# EAGLE board nintendo (EAGLE 7.7.0)
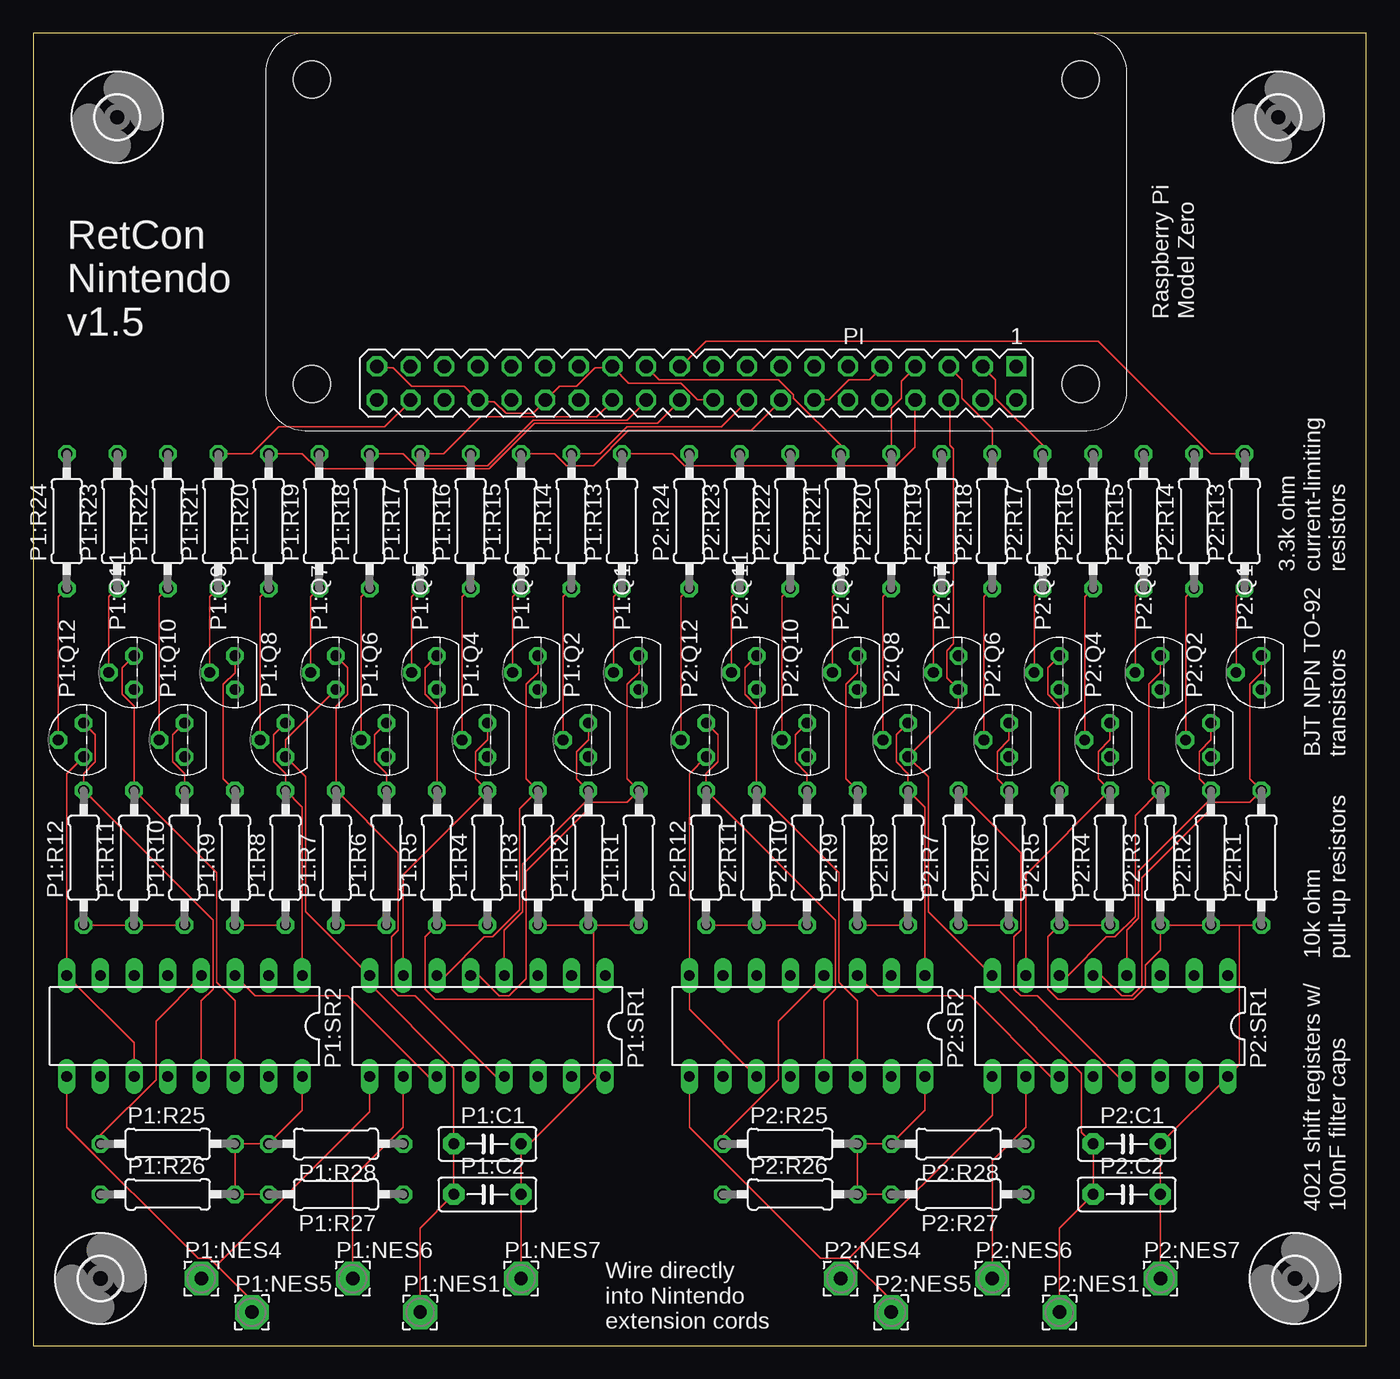
[diagram p0: board, top side]
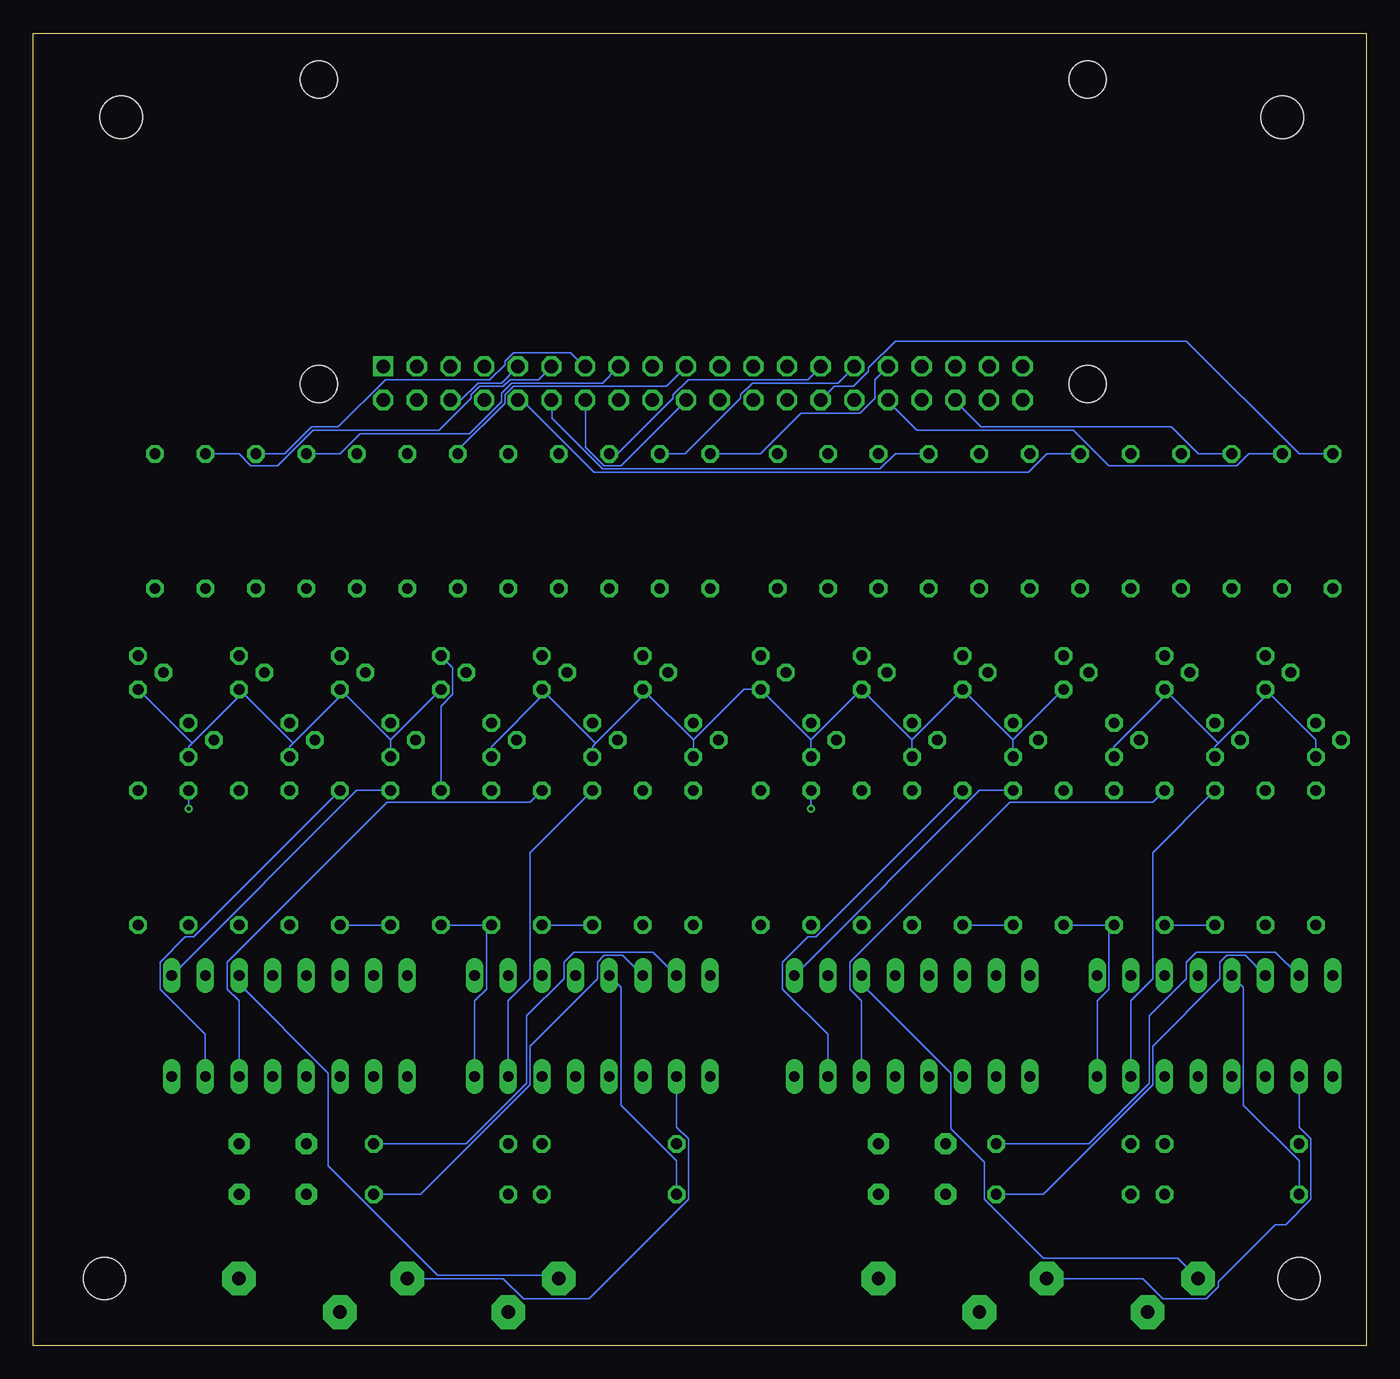
[diagram p1: board, bottom side, seen from below]

Size 100.64 x 99.05 mm. Coordinates in mm from the lower left corner, seen from the top.
Outline: 0,0 100.64,0 100.64,99.05 0,99.05 0,0
Copper layers (1*16): Top 0.035mm / dielectric 1.5mm / Bottom 0.035mm
Design rules "dirt_cheap_dirty_boards.v1": minimum track width 5mil, minimum drill 12mil, track to track 5mil, track to pad 5mil, pad to pad 5mil, via to via 5mil, smd to smd 0mil, copper to edge 10mil, drill to drill 10mil, minimum pad ring 10mil, minimum via ring 6mil, stop-mask expansion 2mil, vias tented up to drill 25mil, thermal gap 10mil

## Footprints (pad centres in the part's own frame; a part is rotated, then mirrored left to right if it is on the bottom)
C5B2.5 = drill 0.813 pad 1.6 octagon: 1 -2.54,0; 2 2.54,0
2,54/1,0 = drill 1.016 pad 2.54 octagon: 1 0,0
TO92 = drill 0.813 octagon: 1 1.27,0; 2 0,1.905; 3 -1.27,0
0207/10 = drill 0.813 octagon: 1 -5.08,0; 2 5.08,0
DIL16 = drill 0.813 long: 1 -8.89,-3.81; 2 -6.35,-3.81; 3 -3.81,-3.81; 4 -1.27,-3.81; 5 1.27,-3.81; 6 3.81,-3.81; 7 6.35,-3.81; 8 8.89,-3.81; 9 8.89,3.81; 10 6.35,3.81; 11 3.81,3.81; 12 1.27,3.81; 13 -1.27,3.81; 14 -3.81,3.81; 15 -6.35,3.81; 16 -8.89,3.81
PIZERO_THOUGH_HOLE = drill 1.016 square: 1 8.34,25.15 | drill 1.016 octagon: 2 8.34,27.69; 3 10.88,25.15; 4 10.88,27.69; 5 13.42,25.15; 6 13.42,27.69; 7 15.96,25.15; 8 15.96,27.69; 9 18.5,25.15; 10 18.5,27.69; 11 21.04,25.15; 12 21.04,27.69; 13 23.58,25.15; 14 23.58,27.69; 15 26.12,25.15; 16 26.12,27.69; 17 28.66,25.15; 18 28.66,27.69; 19 31.2,25.15; 20 31.2,27.69; 21 33.74,25.15; 22 33.74,27.69; 23 36.28,25.15; 24 36.28,27.69; 25 38.82,25.15; 26 38.82,27.69; 27 41.36,25.15; 28 41.36,27.69; 29 43.9,25.15; 30 43.9,27.69; 31 46.44,25.15; 32 46.44,27.69; 33 48.98,25.15; 34 48.98,27.69; 35 51.52,25.15; 36 51.52,27.69; 37 54.06,25.15; 38 54.06,27.69; 39 56.6,25.15; 40 56.6,27.69 | hole 2.8: 3.5,3.5; 3.5,26.5; 61.5,26.5; 61.5,3.5
3,2 = hole 3.2: 0,0

## Placement (x,y rotation side)
P1:C1  100nF  [C5B2.5]  34.29,15.24 0 top
P1:C2  100nF  [C5B2.5]  34.29,11.43 0 top
P1:NES1  -  [2,54/1,0]  29.21,2.54 0 top
P1:NES4  -  [2,54/1,0]  12.7,5.08 0 top
P1:NES5  -  [2,54/1,0]  16.51,2.54 0 top
P1:NES6  -  [2,54/1,0]  24.13,5.08 0 top
P1:NES7  -  [2,54/1,0]  36.83,5.08 0 top
P1:Q1  2N3904  [TO92]  45.72,50.8 90 top
P1:Q2  2N3904  [TO92]  41.91,45.72 90 top
P1:Q3  2N3904  [TO92]  38.1,50.8 90 top
P1:Q4  2N3904  [TO92]  34.29,45.72 90 top
P1:Q5  2N3904  [TO92]  30.48,50.8 90 top
P1:Q6  2N3904  [TO92]  26.67,45.72 90 top
P1:Q7  2N3904  [TO92]  22.86,50.8 90 top
P1:Q8  2N3904  [TO92]  19.05,45.72 90 top
P1:Q9  2N3904  [TO92]  15.24,50.8 90 top
P1:Q10  2N3904  [TO92]  11.43,45.72 90 top
P1:Q11  2N3904  [TO92]  7.62,50.8 90 top
P1:Q12  2N3904  [TO92]  3.81,45.72 90 top
P1:R1  10k  [0207/10]  45.72,36.83 90 top
P1:R2  10k  [0207/10]  41.91,36.83 90 top
P1:R3  10k  [0207/10]  38.1,36.83 90 top
P1:R4  10k  [0207/10]  34.29,36.83 90 top
P1:R5  10k  [0207/10]  30.48,36.83 90 top
P1:R6  10k  [0207/10]  26.67,36.83 90 top
P1:R7  10k  [0207/10]  22.86,36.83 90 top
P1:R8  10k  [0207/10]  19.05,36.83 90 top
P1:R9  10k  [0207/10]  15.24,36.83 90 top
P1:R10  10k  [0207/10]  11.43,36.83 90 top
P1:R11  10k  [0207/10]  7.62,36.83 90 top
P1:R12  10k  [0207/10]  3.81,36.83 90 top
P1:R13  3.3k  [0207/10]  44.45,62.23 90 top
P1:R14  3.3k  [0207/10]  40.64,62.23 90 top
P1:R15  3.3k  [0207/10]  36.83,62.23 90 top
P1:R16  3.3k  [0207/10]  33.02,62.23 90 top
P1:R17  3.3k  [0207/10]  29.21,62.23 90 top
P1:R18  3.3k  [0207/10]  25.4,62.23 90 top
P1:R19  3.3k  [0207/10]  21.59,62.23 90 top
P1:R20  3.3k  [0207/10]  17.78,62.23 90 top
P1:R21  3.3k  [0207/10]  13.97,62.23 90 top
P1:R22  3.3k  [0207/10]  10.16,62.23 90 top
P1:R23  3.3k  [0207/10]  6.35,62.23 90 top
P1:R24  3.3k  [0207/10]  2.54,62.23 90 top
P1:R25  10k  [0207/10]  10.16,15.24 0 top
P1:R26  10k  [0207/10]  10.16,11.43 0 top
P1:R27  10k  [0207/10]  22.86,11.43 180 top
P1:R28  10k  [0207/10]  22.86,15.24 180 top
P1:SR1  4021N  [DIL16]  34.29,24.13 180 top
P1:SR2  4021N  [DIL16]  11.43,24.13 180 top
P2:C1  100nF  [C5B2.5]  82.55,15.24 0 top
P2:C2  100nF  [C5B2.5]  82.55,11.43 0 top
P2:NES1  -  [2,54/1,0]  77.47,2.54 0 top
P2:NES4  -  [2,54/1,0]  60.96,5.08 0 top
P2:NES5  -  [2,54/1,0]  64.77,2.54 0 top
P2:NES6  -  [2,54/1,0]  72.39,5.08 0 top
P2:NES7  -  [2,54/1,0]  85.09,5.08 0 top
P2:Q1  2N3904  [TO92]  92.71,50.8 90 top
P2:Q2  2N3904  [TO92]  88.9,45.72 90 top
P2:Q3  2N3904  [TO92]  85.09,50.8 90 top
P2:Q4  2N3904  [TO92]  81.28,45.72 90 top
P2:Q5  2N3904  [TO92]  77.47,50.8 90 top
P2:Q6  2N3904  [TO92]  73.66,45.72 90 top
P2:Q7  2N3904  [TO92]  69.85,50.8 90 top
P2:Q8  2N3904  [TO92]  66.04,45.72 90 top
P2:Q9  2N3904  [TO92]  62.23,50.8 90 top
P2:Q10  2N3904  [TO92]  58.42,45.72 90 top
P2:Q11  2N3904  [TO92]  54.61,50.8 90 top
P2:Q12  2N3904  [TO92]  50.8,45.72 90 top
P2:R1  10k  [0207/10]  92.71,36.83 90 top
P2:R2  10k  [0207/10]  88.9,36.83 90 top
P2:R3  10k  [0207/10]  85.09,36.83 90 top
P2:R4  10k  [0207/10]  81.28,36.83 90 top
P2:R5  10k  [0207/10]  77.47,36.83 90 top
P2:R6  10k  [0207/10]  73.66,36.83 90 top
P2:R7  10k  [0207/10]  69.85,36.83 90 top
P2:R8  10k  [0207/10]  66.04,36.83 90 top
P2:R9  10k  [0207/10]  62.23,36.83 90 top
P2:R10  10k  [0207/10]  58.42,36.83 90 top
P2:R11  10k  [0207/10]  54.61,36.83 90 top
P2:R12  10k  [0207/10]  50.8,36.83 90 top
P2:R13  3.3k  [0207/10]  91.44,62.23 90 top
P2:R14  3.3k  [0207/10]  87.63,62.23 90 top
P2:R15  3.3k  [0207/10]  83.82,62.23 90 top
P2:R16  3.3k  [0207/10]  80.01,62.23 90 top
P2:R17  3.3k  [0207/10]  76.2,62.23 90 top
P2:R18  3.3k  [0207/10]  72.39,62.23 90 top
P2:R19  3.3k  [0207/10]  68.58,62.23 90 top
P2:R20  3.3k  [0207/10]  64.77,62.23 90 top
P2:R21  3.3k  [0207/10]  60.96,62.23 90 top
P2:R22  3.3k  [0207/10]  57.15,62.23 90 top
P2:R23  3.3k  [0207/10]  53.34,62.23 90 top
P2:R24  3.3k  [0207/10]  49.53,62.23 90 top
P2:R25  10k  [0207/10]  57.15,15.24 0 top
P2:R26  10k  [0207/10]  57.15,11.43 0 top
P2:R27  10k  [0207/10]  69.85,11.43 180 top
P2:R28  10k  [0207/10]  69.85,15.24 180 top
P2:SR1  4021N  [DIL16]  81.28,24.13 180 top
P2:SR2  4021N  [DIL16]  58.42,24.13 180 top
PI  PIZERO_THROUGH_HOLE  [PIZERO_THOUGH_HOLE]  82.55,99.06 180 top
U$1  [3,2]  93.98,92.71 0 top
U$2  [3,2]  6.35,92.71 0 top
U$3  [3,2]  95.25,5.08 0 top
U$4  [3,2]  5.08,5.08 0 top

## Library data of the parts
P1:C1 P1:C2 P2:C1 P2:C2 = capacitor-wima
P1:NES1 P1:NES4-P1:NES7 P2:NES1 P2:NES4-P2:NES7 = wirepad
P1:Q1-P1:Q12 P2:Q1-P2:Q12 = transistor-npn
P1:R1-P1:R28 P2:R1-P2:R28 = resistor
P1:SR1 P1:SR2 P2:SR1 P2:SR2 = 40xx
PI = pizero
U$1-U$4 = holes

## Nets
N$1: P2:R14.2 PI.11
N$2: P1:C1.1 P1:C2.1 P1:NES1.1 P1:Q1.3 P1:Q2.3 P1:Q3.3 P1:Q4.3 P1:Q5.3 P1:Q6.3 P1:Q7.3 P1:Q8.3 P1:Q9.3 P1:Q10.3 P1:Q11.3 P1:Q12.3 P1:SR1.8 P1:SR2.8 P1:SR2.11 P2:C1.1 P2:C2.1 P2:NES1.1 P2:Q1.3 P2:Q2.3 P2:Q3.3 P2:Q4.3 P2:Q5.3 P2:Q6.3 P2:Q7.3 P2:Q8.3 P2:Q9.3 P2:Q10.3 P2:Q11.3 P2:Q12.3 P2:SR1.8 P2:SR2.8 P2:SR2.11 PI.6 PI.9 PI.14 PI.20 PI.25 PI.30 PI.34 PI.39
N$3: P2:R15.2 PI.13
N$4: P2:R17.2 PI.3
N$5: P2:R18.2 PI.5
N$6: P2:R20.2 PI.7
N$7: P2:R16.2 PI.15
N$8: P2:R19.2 PI.19
N$9: P2:R13.2 PI.21
N$10: P1:R13.2 PI.8
N$11: P1:R19.2 PI.10
N$12: P1:R16.2 PI.12
N$13: P1:R15.2 PI.16
N$14: P1:R14.2 PI.18
N$15: P1:R20.2 PI.22
N$16: P1:R18.2 PI.24
N$17: P1:R17.2 PI.26
N$18: P2:R21.2 PI.23
N$19: P2:R22.2 PI.27
N$20: P2:R23.2 PI.29
N$21: P2:R24.2 PI.31
N$22: P1:R21.2 PI.38
N$23: P1:R22.2 PI.36
N$24: P1:R23.2 PI.32
N$25: P1:R24.2 PI.28
P1:A: P1:Q5.1 P1:R5.2 P1:SR1.15
P1:B: P1:Q6.1 P1:R6.2 P1:SR1.1
P1:C: P1:Q8.1 P1:R8.2 P1:SR2.1
P1:CLK: P1:NES6.1 P1:SR1.10 P1:SR2.10
P1:D: P1:Q2.1 P1:R2.2 P1:SR1.5
P1:L: P1:Q3.1 P1:R3.2 P1:SR1.6
P1:LATCH: P1:NES5.1 P1:SR1.9 P1:SR2.9
P1:N$1: P1:Q9.2 P1:R21.1
P1:N$2: P1:Q1.2 P1:R13.1
P1:N$3: P1:Q10.2 P1:R22.1
P1:N$4: P1:Q11.2 P1:R23.1
P1:N$5: P1:Q12.2 P1:R24.1
P1:N$9: P1:Q2.2 P1:R14.1
P1:N$10: P1:Q3.2 P1:R15.1
P1:N$11: P1:Q4.2 P1:R16.1
P1:N$12: P1:Q5.2 P1:R17.1
P1:N$13: P1:Q6.2 P1:R18.1
P1:N$14: P1:Q7.2 P1:R19.1
P1:N$15: P1:Q8.2 P1:R20.1
P1:N$19: P1:SR1.11 P1:SR2.3
P1:N$20: P1:R25.1 P1:SR2.4
P1:N$21: P1:R26.1 P1:SR2.5
P1:N$22: P1:R27.1 P1:SR2.6
P1:N$23: P1:R28.1 P1:SR2.7
P1:OUT: P1:NES4.1 P1:SR1.3
P1:R: P1:Q4.1 P1:R4.2 P1:SR1.7
P1:SL: P1:Q9.1 P1:R9.2 P1:SR1.14
P1:ST: P1:Q7.1 P1:R7.2 P1:SR1.13
P1:TL: P1:Q11.1 P1:R11.2 P1:SR2.14
P1:TR: P1:Q12.1 P1:R12.2 P1:SR2.13
P1:U: P1:Q1.1 P1:R1.2 P1:SR1.4
P1:VCC: P1:C1.2 P1:C2.2 P1:NES7.1 P1:R1.1 P1:R2.1 P1:R3.1 P1:R4.1 P1:R5.1 P1:R6.1 P1:R7.1 P1:R8.1 P1:R9.1 P1:R10.1 P1:R11.1 P1:R12.1 P1:R25.2 P1:R26.2 P1:R27.2 P1:R28.2 P1:SR1.16 P1:SR2.16
P1:X: P1:Q10.1 P1:R10.2 P1:SR2.15
P2:A: P2:Q5.1 P2:R5.2 P2:SR1.15
P2:B: P2:Q6.1 P2:R6.2 P2:SR1.1
P2:C: P2:Q8.1 P2:R8.2 P2:SR2.1
P2:CLK: P2:NES6.1 P2:SR1.10 P2:SR2.10
P2:D: P2:Q2.1 P2:R2.2 P2:SR1.5
P2:L: P2:Q3.1 P2:R3.2 P2:SR1.6
P2:LATCH: P2:NES5.1 P2:SR1.9 P2:SR2.9
P2:N$1: P2:Q9.2 P2:R21.1
P2:N$2: P2:Q1.2 P2:R13.1
P2:N$3: P2:Q10.2 P2:R22.1
P2:N$4: P2:Q11.2 P2:R23.1
P2:N$5: P2:Q12.2 P2:R24.1
P2:N$9: P2:Q2.2 P2:R14.1
P2:N$10: P2:Q3.2 P2:R15.1
P2:N$11: P2:Q4.2 P2:R16.1
P2:N$12: P2:Q5.2 P2:R17.1
P2:N$13: P2:Q6.2 P2:R18.1
P2:N$14: P2:Q7.2 P2:R19.1
P2:N$15: P2:Q8.2 P2:R20.1
P2:N$19: P2:SR1.11 P2:SR2.3
P2:N$20: P2:R25.1 P2:SR2.4
P2:N$21: P2:R26.1 P2:SR2.5
P2:N$22: P2:R27.1 P2:SR2.6
P2:N$23: P2:R28.1 P2:SR2.7
P2:OUT: P2:NES4.1 P2:SR1.3
P2:R: P2:Q4.1 P2:R4.2 P2:SR1.7
P2:SL: P2:Q9.1 P2:R9.2 P2:SR1.14
P2:ST: P2:Q7.1 P2:R7.2 P2:SR1.13
P2:TL: P2:Q11.1 P2:R11.2 P2:SR2.14
P2:TR: P2:Q12.1 P2:R12.2 P2:SR2.13
P2:U: P2:Q1.1 P2:R1.2 P2:SR1.4
P2:VCC: P2:C1.2 P2:C2.2 P2:NES7.1 P2:R1.1 P2:R2.1 P2:R3.1 P2:R4.1 P2:R5.1 P2:R6.1 P2:R7.1 P2:R8.1 P2:R9.1 P2:R10.1 P2:R11.1 P2:R12.1 P2:R25.2 P2:R26.2 P2:R27.2 P2:R28.2 P2:SR1.16 P2:SR2.16
P2:X: P2:Q10.1 P2:R10.2 P2:SR2.15

## Tracks (layer width: path | path; a pad name or v marks a point on that pad's centre or on a via)
N$1
  Bottom 0.127: P2:R14.2 85.09,67.31 84.2,66.42 82.17,66.42 79.5,69.09 69.98,69.09 67.56,71.5 67.56,71.75 66.93,72.39 65.15,72.39 64.64,72.9 62.48,72.9 61.59,73.79 PI.11
N$2
  Top 0.127: P1:NES1.1 29.21,8.89 P1:C2.1 P1:C1.1 31.75,20.95 25.4,27.3 P1:SR1.8 20.57,32.77 20.57,42.93 P1:Q8.3 19.05,45.72 P1:Q7.3 | P1:SR2.11 7.62,22.86 P1:SR2.8 2.54,43.18 P1:Q12.3 | PI.14 59.05,71.37 60.07,71.37 61.59,72.9 63.12,72.9 64.01,73.79 PI.9 | PI.39 26.04,73.79 27.18,73.79 28.57,72.39 32.51,72.39 33.53,71.37 PI.34 33.66,71.25 34.8,71.25 35.69,70.36 37.72,70.36 38.61,71.25 PI.30 38.73,71.37 39.75,72.39 41.02,72.39 42.42,73.79 43.69,73.79 PI.25 43.81,73.79 44.96,72.64 48.9,72.64 50.16,71.37 51.31,71.37 PI.20 | P2:NES1.1 77.47,8.89 P2:C2.1 P2:C1.1 79.12,16.13 79.12,20.57 72.39,27.3 P2:SR1.8 67.56,32.77 67.56,42.93 P2:Q8.3 69.85,48.26 P2:Q7.3 68.96,50.42 68.96,52.45 69.47,52.96 69.47,67.69 69.22,67.94 69.22,71.25 PI.6 | P2:SR2.11 49.53,25.4 P2:SR2.8 49.53,43.18 P2:Q12.3
  Bottom 0.127: 41.91,45.72 P1:Q2.3 | 41.91,45.72 P1:Q3.3 34.29,45.72 | 41.91,45.72 P1:Q1.3 46.99,49.53 50.8,45.72 | 34.29,45.72 P1:Q4.3 | 34.29,45.72 P1:Q5.3 26.67,45.72 | 26.67,45.72 P1:Q6.3 | P1:Q7.3 26.67,45.72 | P1:Q12.3 3.81,45.72 7.37,49.28 | P1:Q10.3 11.43,45.21 11.18,45.47 | 7.37,49.28 11.18,45.47 | 7.37,49.28 P1:Q11.3 | 11.18,45.47 14.99,49.28 | P1:Q8.3 19.05,45.21 14.99,49.28 | 14.99,49.28 P1:Q9.3 | PI.6 69.09,71.37 68.33,71.37 67.06,72.64 65.28,72.64 64.14,73.79 PI.9 | PI.14 58.93,71.25 58.93,67.82 57.53,66.42 56.26,66.42 51.44,71.25 PI.20 | 50.8,45.72 P2:Q12.3 | 54.36,49.28 50.8,45.72 | P2:Q10.3 58.42,45.21 58.17,45.47 | 54.36,49.28 58.17,45.47 | 54.36,49.28 P2:Q11.3 | 58.17,45.47 61.98,49.28 | P2:Q8.3 66.04,45.21 61.98,49.28 | 61.98,49.28 P2:Q9.3 | 73.66,45.72 P2:Q6.3 | P2:Q7.3 73.66,45.72 | 73.66,45.72 77.22,49.28 | P2:Q4.3 81.28,45.21 81.03,45.47 | 77.22,49.28 81.03,45.47 | 77.22,49.28 P2:Q5.3 | 81.03,45.47 84.84,49.28 | P2:Q2.3 88.9,45.21 88.65,45.47 | 84.84,49.28 88.65,45.47 | 84.84,49.28 P2:Q3.3 | 88.65,45.47 P2:Q1.3
N$3
  Bottom 0.127: P2:R15.2 81.66,67.31 79.63,69.34 77.6,69.34 74.04,72.9 66.17,72.9 65.02,74.04 65.02,74.3 64.39,74.93 60.07,74.93 59.05,73.91 PI.13
N$4
  Top 0.127: P2:R17.2 76.2,67.94 72.64,71.5 72.64,72.9 71.75,73.79 PI.3
N$5
  Top 0.127: P2:R18.2 72.39,69.22 70.1,71.5 70.1,72.9 69.22,73.79 PI.5
N$6
  Top 0.127: P2:R20.2 64.77,70.74 65.53,71.5 65.53,72.77 66.55,73.79 PI.7
N$7
  Bottom 0.127: P2:R16.2 77.47,67.31 75.95,68.83 67.69,68.83 65.28,71.25 65.28,71.88 64.52,72.64 57.66,72.64 56.52,73.79 PI.15
N$8
  Bottom 0.127: P2:R19.2 68.58,67.56 65.02,71.12 65.02,71.75 64.39,72.39 52.83,72.39 51.44,73.79 PI.19
N$9
  Top 0.127: P2:R13.2 88.9,67.31 80.39,75.82 50.8,75.82 48.9,73.91 PI.21
N$10
  Top 0.127: P1:R13.2 48.26,67.31 49.15,66.42 65.15,66.42 66.55,67.82 66.55,71.25 PI.8
N$11
  Bottom 0.127: P1:R19.2 24.13,67.31 25.53,65.91 58.29,65.91 63.63,71.25 64.01,71.25 PI.10
N$12
  Bottom 0.127: P1:R16.2 35.56,67.31 36.7,66.17 57.66,66.17 61.47,69.98 61.47,71.25 PI.12
N$13
  Top 0.127: P1:R15.2 39.37,67.31 40.26,66.42 42.29,66.42 44.96,69.09 54.23,69.09 56.39,71.25 PI.16
N$14
  Top 0.127: P1:R14.2 42.8,67.31 44.83,69.34 51.94,69.34 53.85,71.25 PI.18
N$15
  Top 0.127: P1:R20.2 20.32,67.31 21.46,66.17 34.42,66.17 37.85,69.6 47.12,69.6 48.77,71.25 PI.22
N$16
  Top 0.127: P1:R18.2 27.94,67.31 28.83,66.42 34.29,66.42 37.72,69.85 44.83,69.85 46.23,71.25 PI.24
N$17
  Top 0.127: P1:R17.2 30.99,67.31 33.78,70.1 42.55,70.1 43.69,71.25 PI.26
N$18
  Top 0.127: P2:R21.2 60.96,67.94 57.4,71.5 57.4,71.75 56.26,72.9 47.24,72.9 46.35,73.79 PI.23
N$19
  Bottom 0.127: P2:R22.2 56.52,67.31 52.32,71.5 52.32,71.75 51.18,72.9 42.16,72.9 41.27,73.79 PI.27
N$20
  Bottom 0.127: P2:R23.2 51.44,67.31 47.24,71.5 47.24,71.75 46.35,72.64 39.88,72.64 38.73,73.79 PI.29
N$21
  Bottom 0.127: P2:R24.2 45.72,67.31 42.67,70.36 38.23,70.36 37.08,71.5 37.08,72.9 36.2,73.79 PI.31
N$22
  Top 0.127: P1:R21.2 16.51,67.31 18.54,69.34 26.54,69.34 28.45,71.25 PI.38
N$23
  Bottom 0.127: P1:R22.2 12.7,67.31 14.73,69.34 29.08,69.34 30.99,71.25 PI.36
N$24
  Bottom 0.127: P1:R23.2 8.89,67.31 9.78,66.42 19.43,66.42 22.1,69.09 33.91,69.09 36.07,71.25 PI.32
N$25
  Bottom 0.127: P1:R24.2 5.08,67.31 13.59,75.82 35.56,75.82 37.59,73.79 37.59,73.53 38.73,72.39 40.13,72.39 41.15,71.37 PI.28
P1:A
  Top 0.127: P1:R5.2 30.48,48.26 29.59,49.15 29.59,51.18 P1:Q5.1
  Bottom 0.127: P1:SR1.15 40.64,23.5 44.07,26.92 44.07,28.96 42.16,30.86 41.53,30.86 P1:R5.2
P1:B
  Top 0.127: P1:R6.2 26.67,43.18 25.78,44.07 25.78,46.1 P1:Q6.1
  Bottom 0.127: P1:SR1.1 29.21,41.91 P1:R6.2
P1:C
  Top 0.127: P1:Q8.1 18.16,46.1 18.16,44.07 19.05,43.18 P1:R8.2 20.32,40.64 P1:SR2.1
P1:CLK
  Top 0.127: P1:SR1.10 27.94,16.51 24.13,12.7 P1:NES6.1
  Bottom 0.127: P1:SR2.10 5.08,16.51 4.19,15.62 4.19,11.05 6.1,9.14 6.86,9.14 11.18,4.83 11.18,4.45 12.06,3.56 15.37,3.56 16.89,5.08 P1:NES6.1
P1:D  (via drill 0.3)
  Top 0.127: P1:SR1.5 33.66,27.94 35.18,26.42 35.94,26.42 37.21,27.69 37.21,35.81 v41.91,40.51 | P1:Q2.1 41.91,45.72 41.02,44.83 41.02,42.8 P1:R2.2
  Bottom 0.127: P1:R2.2 v41.91,40.51
P1:L
  Top 0.127: P1:SR1.6 31.11,27.94 34.04,30.86 34.67,30.86 36.7,32.89 36.7,40.51 P1:R3.2 37.21,42.8 37.21,49.91 38.1,50.8 P1:Q3.1
P1:LATCH
  Top 0.127: P1:SR2.9 2.54,16.51 12.45,6.6 13.34,6.6 13.84,6.1 | 13.84,6.1 16.51,3.43 P1:NES5.1 | P1:SR1.9 25.4,17.65 13.84,6.1
P1:N$1
  Top 0.127: P1:Q9.2 13.34,56.52 P1:R21.1
P1:N$2
  Top 0.127: P1:Q1.2 43.81,56.52 P1:R13.1
P1:N$3
  Top 0.127: P1:Q10.2 9.53,56.52 P1:R22.1
P1:N$4
  Top 0.127: P1:Q11.2 5.71,56.52 P1:R23.1
P1:N$5
  Top 0.127: P1:Q12.2 1.91,56.52 P1:R24.1
P1:N$9
  Top 0.127: P1:Q2.2 40.01,56.52 P1:R14.1
P1:N$10
  Top 0.127: P1:Q3.2 36.2,56.52 P1:R15.1
P1:N$11
  Top 0.127: P1:Q4.2 32.38,56.52 P1:R16.1
P1:N$12
  Top 0.127: P1:Q5.2 28.57,56.52 P1:R17.1
P1:N$13
  Top 0.127: P1:Q6.2 24.77,56.52 P1:R18.1
P1:N$14
  Top 0.127: P1:Q7.2 20.95,56.52 P1:R19.1
P1:N$15
  Top 0.127: P1:Q8.2 17.14,56.52 P1:R20.1
P1:N$19
  Top 0.127: P1:SR1.11 29.84,20.32 23.75,26.42 16.76,26.42 P1:SR2.3
P1:N$20
  Top 0.127: P1:R25.1 5.08,15.88 9.27,20.07 9.27,24.51 P1:SR2.4
P1:N$21
  Bottom 0.127: P1:R26.1 5.08,13.97 9.27,18.16 9.27,27.05 P1:SR2.5
P1:N$22
  Bottom 0.127: P1:R27.1 24.38,11.43 16.13,19.68 16.13,22.61 11.05,27.69 11.05,28.96 10.54,29.46 9.14,29.46 P1:SR2.6
P1:N$23
  Bottom 0.127: P1:R28.1 20.95,15.24 16.38,19.81 16.38,24.89 13.59,27.69 13.59,28.96 12.83,29.72 6.86,29.72 P1:SR2.7
P1:OUT
  Bottom 0.127: P1:SR1.3 38.1,27.3 31.37,20.57 31.37,16.38 28.83,13.84 28.83,11.05 24.38,6.6 14.22,6.6 P1:NES4.1
P1:R
  Top 0.127: P1:SR1.7 27.94,35.56 P1:R4.2 33.4,42.8 33.4,44.83 34.29,45.72 P1:Q4.1
P1:SL
  Top 0.127: P1:Q9.1 15.24,50.8 14.35,49.91 14.35,42.8 P1:R9.2
  Bottom 0.127: P1:SR1.14 38.1,26.04 38.99,26.92 38.99,28.96 26.92,41.02 16.13,41.02 P1:R9.2
P1:ST
  Top 0.127: P1:Q7.1 23.75,51.18 23.75,49.15 22.86,48.26 P1:R7.2 27.56,37.21 27.56,31.37 27.05,30.86 27.05,26.92 27.56,26.42 28.83,26.42 34.92,20.32 P1:SR1.13
P1:TL
  Top 0.127: P1:Q11.1 6.73,51.18 6.73,49.15 7.62,48.26 P1:R11.2 13.84,35.69 13.84,27.43 15.24,26.04 P1:SR2.14
P1:TR
  Top 0.127: P1:Q12.1 4.7,46.1 4.7,44.07 3.81,43.18 P1:R12.2 13.59,32.13 13.59,26.92 12.7,26.04 P1:SR2.13
P1:U
  Top 0.127: P1:SR1.4 35.56,31.37 36.96,32.77 36.96,36.32 41.66,41.02 44.83,41.02 P1:R1.2 44.83,42.8 44.83,49.91 45.72,50.8 P1:Q1.1
P1:VCC
  Top 0.127: P1:R3.1 P1:R2.1 42.29,31.75 | 42.29,31.75 P1:R1.1 | 42.55,20.32 37.47,15.24 P1:C1.2 P1:C2.2 P1:NES7.1 | 42.29,26.16 42.29,20.57 42.55,20.32 | 42.29,26.16 42.29,31.75 | 42.55,20.32 P1:SR1.16 | P1:R27.2 P1:R26.2 P1:R25.2 P1:R28.2 20.32,17.78 P1:SR2.16 | P1:R4.1 P1:R5.1 29.59,30.86 29.59,26.92 30.35,26.16 42.29,26.16 | P1:R6.1 P1:R7.1 | P1:R8.1 P1:R9.1 | P1:R12.1 P1:R11.1 P1:R10.1
  Bottom 0.127: P1:R10.1 P1:R9.1 | 19.43,31.75 P1:R7.1 | P1:R6.1 P1:R5.1 | P1:SR2.16 20.32,26.04 19.43,26.92 19.43,31.75 | 19.43,31.75 P1:R8.1
P1:X
  Top 0.127: P1:R10.2 11.43,43.18 10.54,44.07 10.54,46.1 P1:Q10.1
  Bottom 0.127: P1:SR2.15 17.78,26.04 16.13,27.69 16.13,37.21 P1:R10.2
P2:A
  Top 0.127: P2:R5.2 77.47,48.26 76.58,49.15 76.58,51.18 P2:Q5.1
  Bottom 0.127: P2:SR1.15 87.63,23.5 91.06,26.92 91.06,28.96 89.15,30.86 88.52,30.86 P2:R5.2
P2:B
  Top 0.127: P2:Q6.1 73.66,45.72 72.77,44.83 72.77,42.8 P2:R6.2
  Bottom 0.127: P2:SR1.1 76.2,41.91 P2:R6.2
P2:C
  Top 0.127: P2:Q8.1 65.15,46.1 65.15,44.07 66.04,43.18 P2:R8.2 67.31,40.64 P2:SR2.1
P2:CLK
  Top 0.127: P2:SR1.10 74.93,16.51 72.39,13.97 P2:NES6.1
  Bottom 0.127: P2:SR2.10 52.07,16.51 51.18,15.62 51.18,11.05 58.67,3.56 63.63,3.56 65.15,5.08 P2:NES6.1
P2:D  (via drill 0.3)
  Top 0.127: P2:SR1.5 80.64,27.94 82.17,26.42 82.93,26.42 83.69,27.18 83.69,35.31 v88.9,40.51 | P2:Q2.1 88.9,45.72 88.01,44.83 88.01,42.8 P2:R2.2
  Bottom 0.127: P2:R2.2 v88.9,40.51
P2:L
  Top 0.127: P2:SR1.6 78.11,27.94 81.03,30.86 81.66,30.86 83.19,32.38 83.19,40.01 P2:R3.2 84.2,42.8 84.2,49.91 85.09,50.8 P2:Q3.1
P2:LATCH
  Top 0.127: P2:SR2.9 49.53,16.51 59.44,6.6 61.59,6.6 | 61.59,6.6 64.77,3.43 P2:NES5.1 | P2:SR1.9 72.39,17.4 61.59,6.6
P2:N$1
  Top 0.127: P2:Q9.2 60.33,56.52 P2:R21.1
P2:N$2
  Top 0.127: P2:Q1.2 90.81,56.52 P2:R13.1
P2:N$3
  Top 0.127: P2:Q10.2 56.52,56.52 P2:R22.1
P2:N$4
  Top 0.127: P2:Q11.2 52.7,56.52 P2:R23.1
P2:N$5
  Top 0.127: P2:Q12.2 48.9,56.52 P2:R24.1
P2:N$9
  Top 0.127: P2:Q2.2 87,56.52 P2:R14.1
P2:N$10
  Top 0.127: P2:Q3.2 83.19,56.52 P2:R15.1
P2:N$11
  Top 0.127: P2:Q4.2 79.38,56.52 P2:R16.1
P2:N$12
  Top 0.127: P2:Q5.2 75.56,56.52 P2:R17.1
P2:N$13
  Top 0.127: P2:Q6.2 71.75,56.52 P2:R18.1
P2:N$14
  Top 0.127: P2:Q7.2 67.94,56.52 P2:R19.1
P2:N$15
  Top 0.127: P2:Q8.2 64.14,56.52 P2:R20.1
P2:N$19
  Top 0.127: P2:SR1.11 76.83,20.32 70.74,26.42 63.75,26.42 P2:SR2.3
P2:N$20
  Top 0.127: P2:R25.1 52.07,15.88 56.26,20.07 56.26,24.51 P2:SR2.4
P2:N$21
  Bottom 0.127: P2:R26.1 52.07,13.97 56.26,18.16 56.26,27.05 P2:SR2.5
P2:N$22
  Bottom 0.127: P2:R27.1 71.37,11.43 63.12,19.68 63.12,22.61 58.04,27.69 58.04,28.96 57.53,29.46 56.13,29.46 P2:SR2.6
P2:N$23
  Bottom 0.127: P2:R28.1 67.94,15.24 63.37,19.81 63.37,24.89 60.58,27.69 60.58,28.96 59.82,29.72 53.85,29.72 P2:SR2.7
P2:OUT
  Bottom 0.127: P2:SR1.3 85.09,27.3 78.36,20.57 78.36,13.59 70.1,5.33 61.21,5.33 P2:NES4.1
P2:R
  Top 0.127: P2:SR1.7 74.93,35.56 P2:R4.2 80.39,42.8 80.39,44.83 81.28,45.72 P2:Q4.1
P2:SL
  Top 0.127: P2:Q9.1 62.23,50.8 61.34,49.91 61.34,42.8 P2:R9.2
  Bottom 0.127: P2:SR1.14 85.09,26.04 85.98,26.92 85.98,28.96 73.91,41.02 63.12,41.02 P2:R9.2
P2:ST
  Top 0.127: P2:SR1.13 81.92,20.32 75.82,26.42 74.55,26.42 74.04,26.92 74.04,30.86 74.55,31.37 74.55,37.21 P2:R7.2
  Bottom 0.127: P2:R7.2 69.85,48.26 68.96,49.15 68.96,51.18 P2:Q7.1
P2:TL
  Top 0.127: P2:Q11.1 53.72,51.18 53.72,49.15 54.61,48.26 P2:R11.2 60.83,35.69 60.83,27.43 62.23,26.04 P2:SR2.14
P2:TR
  Top 0.127: P2:Q12.1 51.69,46.1 51.69,44.07 50.8,43.18 P2:R12.2 60.58,32.13 60.58,26.92 59.69,26.04 P2:SR2.13
P2:U
  Top 0.127: P2:SR1.4 82.55,31.37 83.44,32.26 83.44,35.81 88.65,41.02 91.82,41.02 P2:R1.2 91.82,42.8 91.82,49.91 92.71,50.8 P2:Q1.1
P2:VCC
  Top 0.127: 91.06,31.75 P2:R2.1 P2:R3.1 85.09,29.84 83.95,28.7 83.95,27.05 83.06,26.16 77.34,26.16 76.58,26.92 76.58,30.86 P2:R5.1 P2:R4.1 | 91.06,31.75 P2:R1.1 | P2:NES7.1 P2:C2.2 P2:C1.2 P2:SR1.16 91.06,21.21 91.06,31.75 | P2:R27.2 P2:R26.2 P2:R25.2 P2:R28.2 67.31,17.78 P2:SR2.16 | P2:R6.1 P2:R7.1 | P2:R8.1 P2:R9.1 | P2:R12.1 P2:R11.1 P2:R10.1
  Bottom 0.127: P2:R10.1 P2:R9.1 | 66.42,31.75 P2:R7.1 | P2:R6.1 P2:R5.1 | P2:SR2.16 67.31,26.04 66.42,26.92 66.42,31.75 | 66.42,31.75 P2:R8.1
P2:X
  Top 0.127: P2:R10.2 58.42,43.18 57.53,44.07 57.53,46.1 P2:Q10.1
  Bottom 0.127: P2:SR2.15 64.77,26.04 63.12,27.69 63.12,37.21 P2:R10.2

## Text on the board
tNames: Raspberry Pi / Model Zero | RetCon / Nintendo / v1.5 | 3.3k ohm / current-limiting / resistors | BJT NPN TO-92 / transistors | 10k ohm / pull-up resistors | 4021 shift registers w/ / 100nF filter caps | Wire directly / into Nintendo / extension cords